# EAGLE board balanceador (EAGLE 7.6.0)
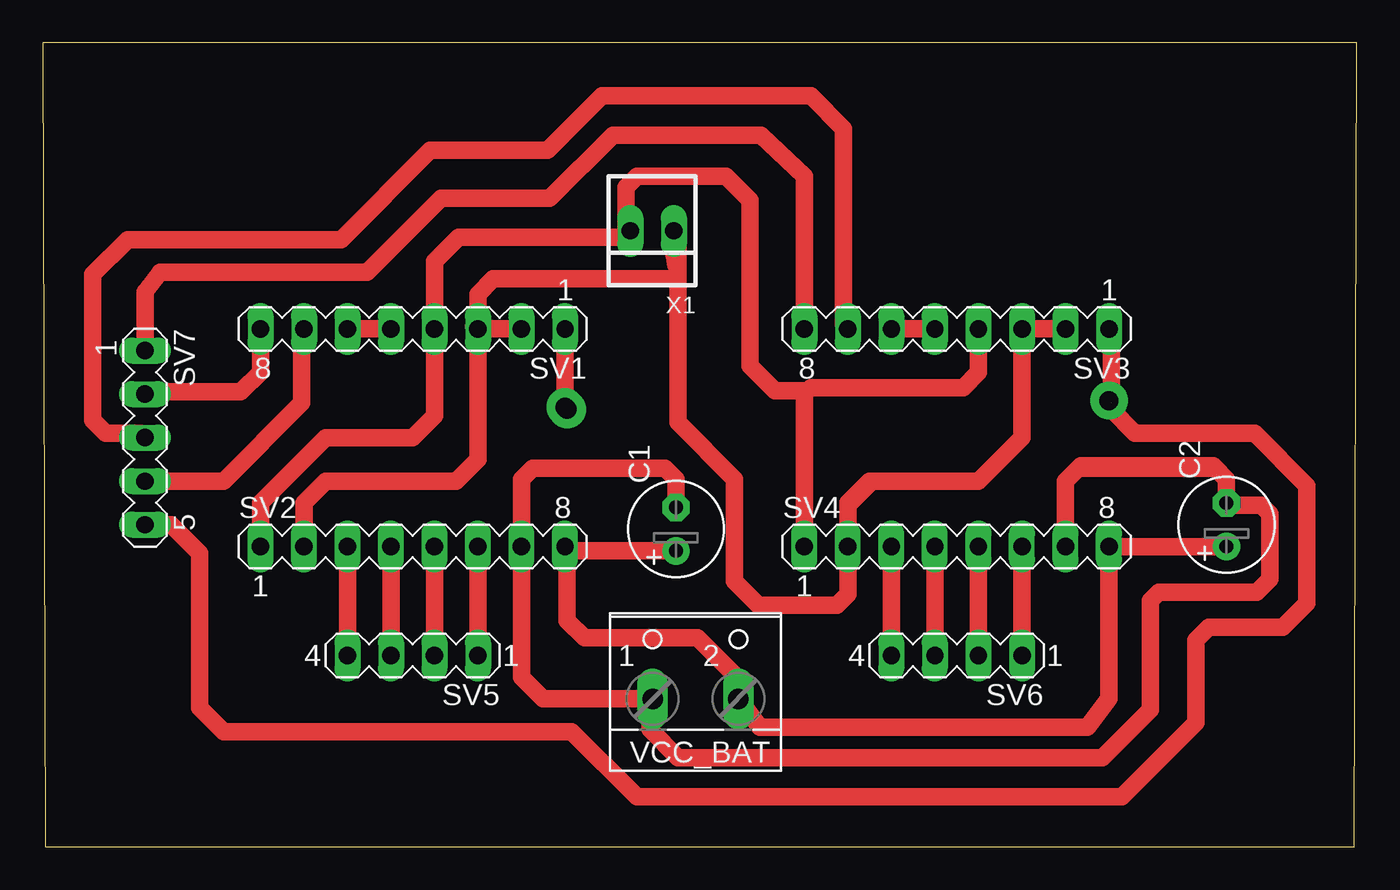
[diagram p0: board, top side]
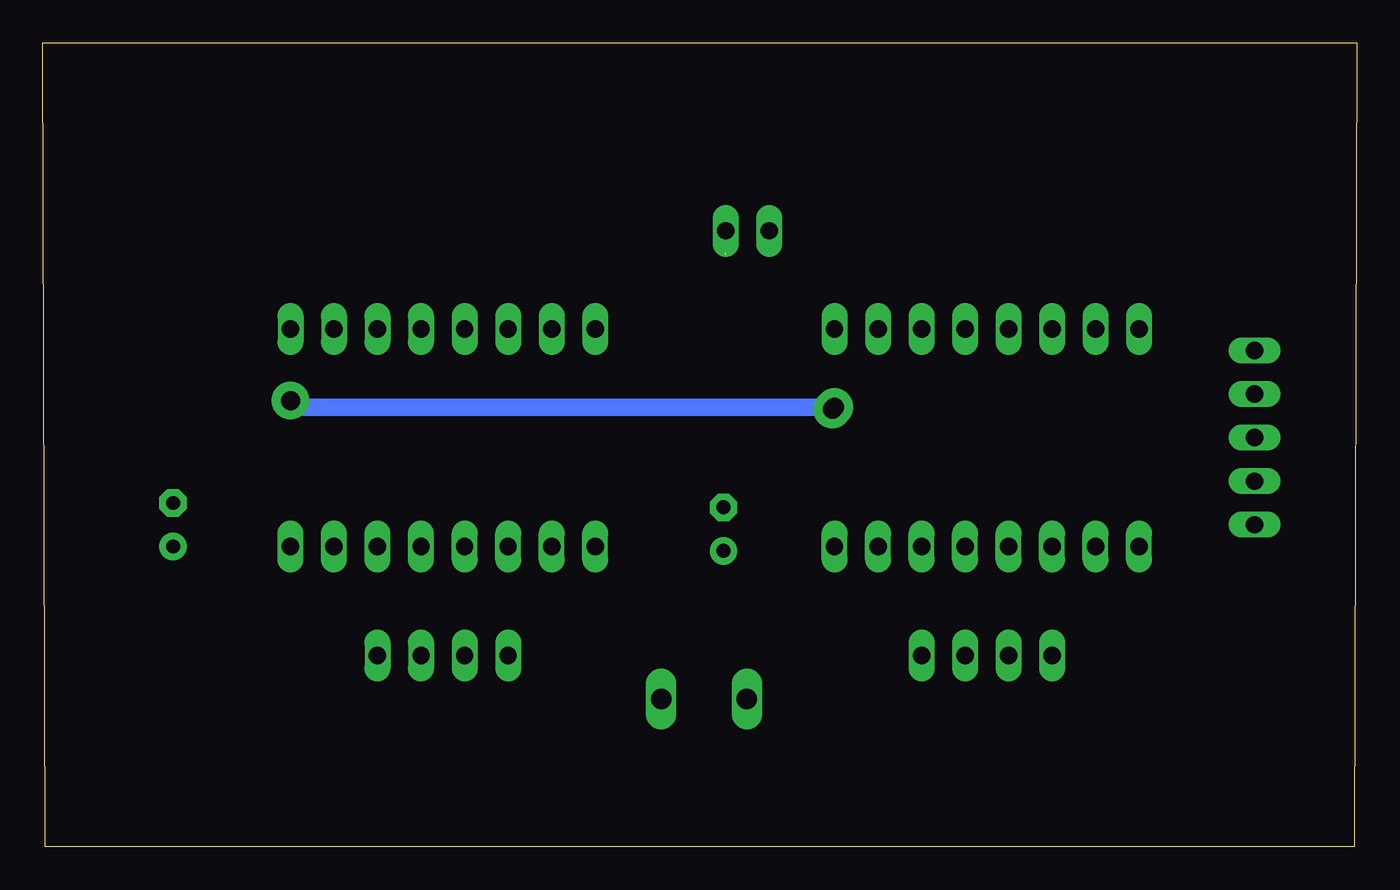
[diagram p1: board, bottom side, seen from below]

Size 76.69 x 46.91 mm. Coordinates in mm from the lower left corner, seen from the top.
Outline: 0.13,0 76.56,0 76.69,46.91 0,46.91 0.13,0
Copper layers (1*16): Top 0.035mm / dielectric 1.5mm / Bottom 0.035mm
Design rules "default": minimum track width 10mil, minimum drill 24mil, track to track 8mil, track to pad 8mil, pad to pad 8mil, via to via 8mil, smd to smd 8mil, copper to edge 40mil, drill to drill 8mil, minimum pad ring 10mil, minimum via ring 8mil, stop-mask expansion 4mil, vias tented up to drill 0mil, thermal gap 10mil

## Footprints (pad centres in the part's own frame; a part is rotated, then mirrored left to right if it is on the bottom)
E2,5-6 = drill 0.813 pad 1.6: + -1.27,0 | drill 0.813 pad 1.6 octagon: - 1.27,0
MA08-1 = drill 1.016 long: 1 -8.89,0; 2 -6.35,0; 3 -3.81,0; 4 -1.27,0; 5 1.27,0; 6 3.81,0; 7 6.35,0; 8 8.89,0
MA04-1 = drill 1.016 long: 1 -3.81,0; 2 -1.27,0; 3 1.27,0; 4 3.81,0
MA05-1 = drill 1.016 long: 1 -5.08,0; 2 -2.54,0; 3 0,0; 4 2.54,0; 5 5.08,0
W237-102 = drill 1.194 long: 1 -2.5,-1.27; 2 2.5,-1.27
22-23-2021 = drill 1 long: 1 -1.27,0; 2 1.27,0

## Placement (x,y rotation side)
C1  [E2,5-6]  36.96,18.54 90 top
C2  [E2,5-6]  69.09,18.8 90 top
SV1  [MA08-1]  21.59,30.23 180 top
SV2  [MA08-1]  21.59,17.53 0 top
SV3  [MA08-1]  53.34,30.23 180 top
SV4  [MA08-1]  53.34,17.53 0 top
SV5  [MA04-1]  21.59,11.18 180 top
SV6  [MA04-1]  53.34,11.18 180 top
SV7  [MA05-1]  5.97,23.88 270 top
VCC_BAT  [W237-102]  38.1,9.91 0 top
X1  22-23-2021  [22-23-2021]  35.56,35.94 180 top

## Library data of the parts
C1 C2 = rcl
SV1-SV7 = con-lstb; OC_FARNELL: unknown; OC_NEWARK: unknown
VCC_BAT = con-wago-500; MPN: 237-102; OC_FARNELL: unknown; OC_NEWARK: 70K9898
X1 = con-molex; MF: MOLEX; MPN: 22-23-2021; OC_FARNELL: 1462926; OC_NEWARK: 25C3832

## Nets
GND: SV1.4 SV2.1 SV3.4 SV4.1 X1.2
N$1: SV2.6 SV5.1
N$2: SV2.5 SV5.2
N$3: SV2.4 SV5.3
N$4: SV2.3 SV5.4
N$5: SV4.6 SV6.1
N$6: SV4.5 SV6.2
N$7: SV4.4 SV6.3
N$8: SV4.3 SV6.4
N$9: SV3.5 SV3.6
N$10: C1.+ C2.+ SV2.8 SV4.8 VCC_BAT.2
N$11: SV1.5 SV1.6
N$12: C1.- C2.- SV2.7 SV4.7 VCC_BAT.1
N$13: SV1.8 SV7.2
N$14: SV1.1 SV3.1 SV7.5
N$15: SV3.8 SV7.1
N$16: SV1.7 SV7.4
N$17: SV3.7 SV7.3
VCC: SV1.2 SV1.3 SV2.2 SV3.2 SV3.3 SV4.2 X1.1

## Tracks (layer width: path | path; a pad name or v marks a point on that pad's centre or on a via)
GND
  Top 1.016: SV2.1 12.7,20.07 16.51,23.88 21.59,23.88 22.86,25.15 SV1.4 22.86,34.16 24.26,35.56 33.91,35.56 X1.2 34.04,36.2 34.04,38.48 34.67,39.12 39.88,39.12 41.27,37.72 41.27,30.48 41.27,29.97 41.27,28.07 42.73,26.61 44.64,26.61 | SV3.4 54.61,27.69 53.72,26.8 44.83,26.8 44.64,26.61 | SV4.1 44.45,26.42 44.64,26.61
N$1
  Top 1.016: SV5.1 SV2.6
N$2
  Top 1.016: SV5.2 SV2.5
N$3
  Top 1.016: SV5.3 SV2.4
N$4
  Top 1.016: SV5.4 SV2.3
N$5
  Top 1.016: SV6.1 SV4.6
N$6
  Top 1.016: SV6.2 SV4.5
N$7
  Top 1.016: SV6.3 SV4.4
N$8
  Top 1.016: SV6.4 SV4.3
N$9
  Top 1.016: SV3.6 SV3.5
N$10
  Top 1.016: C1.+ 30.73,17.27 SV2.8 30.61,17.4 30.61,13.21 31.62,12.19 38.23,12.19 40.64,9.78 40.64,8.68 VCC_BAT.2 41.87,6.98 60.96,6.98 62.23,8.64 SV4.8 C2.+
N$11
  Top 1.016: SV1.6 SV1.5
N$12
  Top 1.016: VCC_BAT.1 35.56,8.64 | VCC_BAT.1 35.56,8.6 35.56,8.64 | 35.56,8.64 29.21,8.64 27.94,9.91 SV2.7 27.94,21.46 28.57,22.1 36.32,22.1 36.96,21.46 C1.- | 68.45,22.1 68.33,22.23 60.58,22.23 60.45,22.1 | SV4.7 59.69,21.34 60.45,22.1 | 60.45,22.1 68.45,22.1 | 68.45,22.1 69.09,21.46 C2.- 69.22,19.94 71.12,19.94 71.63,19.43 71.63,15.62 70.87,14.86 65.15,14.86 64.64,14.35 64.64,8 61.85,5.21 37.08,5.21 35.43,6.86 35.43,8.47 VCC_BAT.1
N$13
  Top 1.016: SV1.8 12.7,27.69 11.56,26.54 6.1,26.54 SV7.2
N$14  (via drill 1.1 pad 2.18)  (1 unrouted)
  Top 1.016: SV7.5 7.49,18.8 9.14,17.15 9.14,8.13 10.54,6.73 30.86,6.73 34.67,2.92 62.99,2.92 67.31,7.24 67.31,12.07 68.07,12.83 72.39,12.83 73.79,14.22 73.79,21.08 70.74,24.13 63.75,24.13 62.36,25.53 62.36,30.1 SV3.1 | SV1.1 v30.48,25.65
  Bottom 1.016: v30.48,25.65 62.1,25.65 62.36,25.91
N$15
  Top 1.016: SV3.8 44.45,39.12 41.91,41.53 33.27,41.53 29.59,37.85 23.24,37.85 18.92,33.53 6.86,33.53 5.97,32.38 SV7.1
N$16
  Top 1.016: SV7.4 10.54,21.34 15.11,25.91 15.11,30.1 SV1.7
N$17
  Top 1.016: SV3.7 46.74,30.48 46.74,41.91 44.83,43.81 32.64,43.81 29.46,40.64 22.61,40.64 17.4,35.43 4.95,35.43 2.92,33.4 2.92,24.89 3.68,24.13 5.71,24.13 SV7.3
N$18  (via drill 1.1 pad 2.18)
  other vias: 30.61,25.53
N$19  (via drill 1.1 pad 2.18)
  other vias: 62.23,26.04
VCC  (1 unrouted)
  Top 1.016: SV3.2 SV3.3 57.15,23.88 54.61,21.34 48.39,21.34 | SV2.2 15.24,20.07 16.51,21.34 24.13,21.34 25.4,22.61 SV1.3 | 25.4,30.61 SV1.3 | 48.39,21.34 48.26,21.34 46.99,20.07 46.99,19.94 | 46.99,19.94 SV4.2 46.99,14.73 46.35,14.1 41.78,14.1 40.39,15.49 40.39,21.46 37.08,24.77 37.08,33.53 | SV1.2 SV1.3 | 48.39,21.34 46.99,19.94 | 36.83,34.67 X1.1 37.08,35.69 37.08,33.53 | 36.83,34.67 36.83,34.54 | 36.83,34.67 36.96,33.91 | 25.4,30.61 25.4,32.26 26.29,33.15 36.7,33.15 37.08,33.53 | 25.4,30.61 25.15,30.35